# EAGLE board PCB-SSB-1x2b (EAGLE 7.7.0)
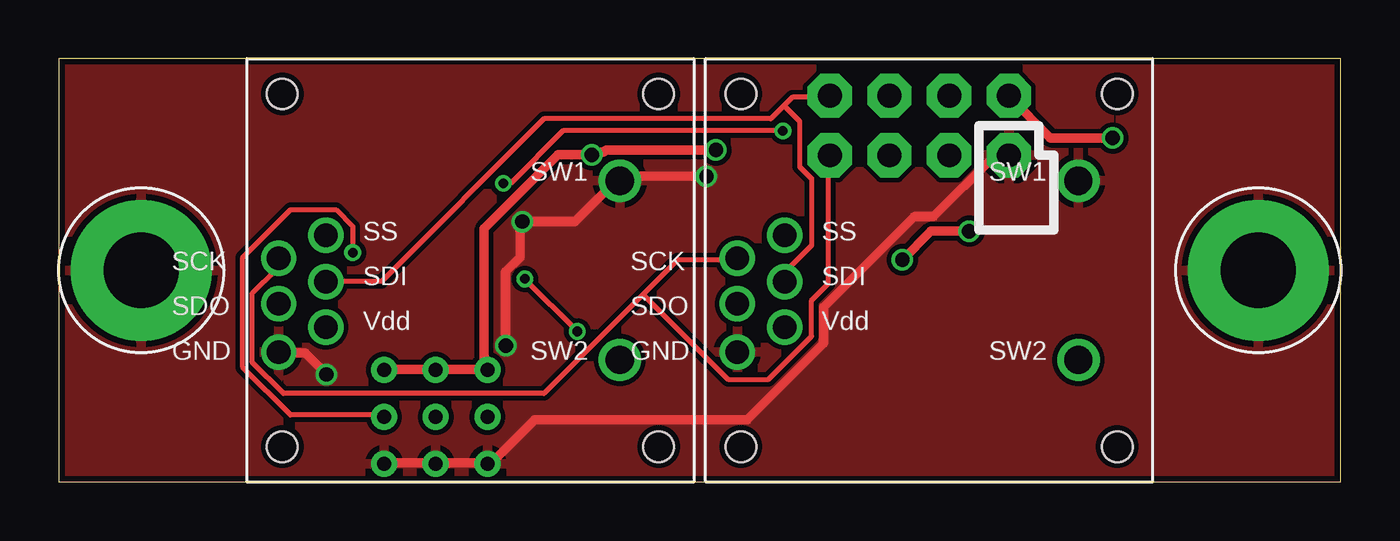
[diagram p0: board, top side]
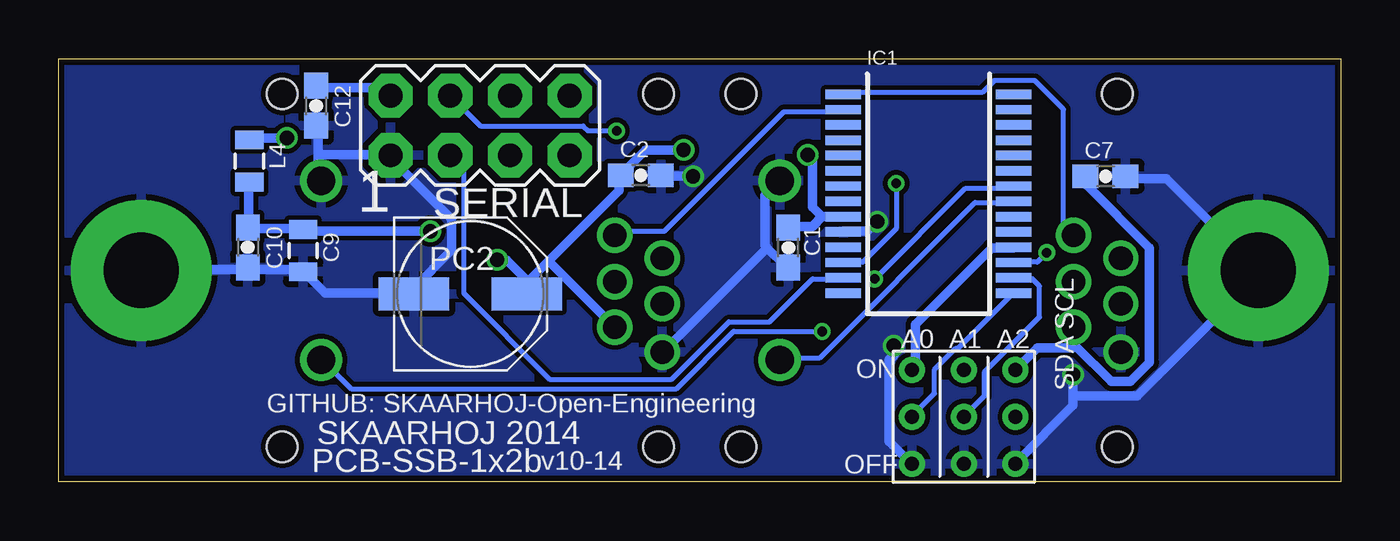
[diagram p1: board, bottom side, seen from below]

Size 54.5 x 18 mm. Coordinates in mm from the lower left corner, seen from the top.
Outline: 0,0 54.5,0 54.5,18 0,18 0,0
Copper layers (1*16): Top 0.035mm / dielectric 1.5mm / Bottom 0.035mm
Design rules "Fusion_eagle_rule_v1.1": minimum track width 6mil, minimum drill 12mil, track to track 6mil, track to pad 6mil, pad to pad 6mil, via to via 6mil, smd to smd 0mil, copper to edge 10mil, drill to drill 10mil, minimum pad ring 10mil, minimum via ring 6mil, stop-mask expansion 2mil, vias tented up to drill 100mil, thermal gap 10mil
Net classes: 0 default: width 0.203 mm, drill 0.406 mm, clearance 0.203 mm; 1 Power: width 0.406 mm, drill 0.61 mm, clearance 0.203 mm

## Footprints (pad centres in the part's own frame; a part is rotated, then mirrored left to right if it is on the bottom)
0603-CAP = smd 1.1 x 1: 1 -0.85,0; 2 0.85,0
0805 = smd 0.8 x 1.2: 1 -0.9,0; 2 0.9,0
SSOP28 = smd 0.4 x 1.5: 1 -4.225,-3.625; 2 -3.575,-3.625; 3 -2.925,-3.625; 4 -2.275,-3.625; 5 -1.625,-3.625; 6 -0.975,-3.625; 7 -0.325,-3.625; 8 0.325,-3.625; 9 0.975,-3.625; 10 1.625,-3.625; 11 2.275,-3.625; 12 2.925,-3.625; 13 3.575,-3.625; 14 4.225,-3.625; 15 4.225,3.625; 16 3.575,3.625; 17 2.925,3.625; 18 2.275,3.625; 19 1.625,3.625; 20 0.975,3.625; 21 0.325,3.625; 22 -0.325,3.625; 23 -0.975,3.625; 24 -1.625,3.625; 25 -2.275,3.625; 26 -2.925,3.625; 27 -3.575,3.625; 28 -4.225,3.625
PANASONIC_D = smd 3 x 1.4: + 2.4,0; - -2.4,0
2X4 = drill 1.016 pad 1.88 octagon: 1 -3.81,-1.27; 2 -3.81,1.27; 3 -1.27,-1.27; 4 -1.27,1.27; 5 1.27,-1.27; 6 1.27,1.27; 7 3.81,-1.27; 8 3.81,1.27
SMART_SWITCH = drill 1.2: 1 6.35,3.81; 2 6.35,-3.81 | drill 1: 3 -8.153,-3.48; 4 -6.147,-2.413; 5 -8.153,-1.422; 6 -6.147,-0.483; 7 -8.153,0.508; 8 -6.147,1.499 | hole 1.3: -8.001,7.506; 8.001,7.506; 8.001,-7.506; -8.001,-7.506
3.2MMPAD6MM = drill 3.2 pad 6: P$1 0,0
3BITADDR = drill 0.6: A0 -2.2,0; A1 0,0; A2 2.2,0; H1 -2.2,2; H2 0,2; H3 2.2,2; L1 -2.2,-2; L2 0,-2; L3 2.2,-2

## Placement (x,y rotation side)
C1  100nF  [0603-CAP]  23.48,9.97 90 bottom
C2  100nF  [0603-CAP]  29.76,13.04 0 bottom
C7  100nF  [0603-CAP]  10,13 0 bottom
C9  22uF  [0805]  44.11,9.84 270 bottom
C10  100nF  [0603-CAP]  46.46,9.98 270 bottom
C12  100nF  [0603-CAP]  43.56,16 270 bottom
IC1  MCP23017SS  [SSOP28]  17.52,12.26 270 bottom
L4  ILHB0805ER121V  [0805]  46.4,13.65 270 bottom
PC2  47u  [PANASONIC_D]  37,8 0 bottom
SERIAL  M04X2  [2X4]  36.59,15.16 0 bottom
SSW1  SMART_SWITCHSMART_SWITCH_8PIN  [SMART_SWITCH]  17.5,9 0 top
SSW2  SMART_SWITCHSMART_SWITCH_8PIN  [SMART_SWITCH]  37,9 0 top
U$15  GNDPAD6MM  [3.2MMPAD6MM]  3.5,9 0 top
U$18  GNDPAD6MM  [3.2MMPAD6MM]  51,9 0 top
U$19  3BITADDR  [3BITADDR]  16.03,2.77 0 bottom

## Library data of the parts
C1 C2 C7 C10 C12 = SparkFun; SKAARHOJ_ID: SK_10uF
C9 = SparkFun; SKAARHOJ_ID: SK_22uF
IC1 = microchip; MF: MICROCHIP; MPN: MCP23017-E/SS; OC_FARNELL: 1467674; OC_NEWARK: 31K2960; SKAARHOJ_ID: SK_MCP23017
L4 = SparkFun; SKAARHOJ_ID: SK_10uHBEAD
PC2 = rcl; SKAARHOJ_ID: SK_47uF
SERIAL = SparkFun; SKAARHOJ_ID: SK_2x4header
SSW1 SSW2 U$15 U$18 U$19 = SKAARHOJ

## Nets
5V [Power]: C1.2 C2.1 C7.1 C9.1 C10.1 IC1.9 IC1.18 L4.2 PC2.+ SSW1.4 SSW2.4 U$19.H1 U$19.H2 U$19.H3
A0: IC1.15 U$19.A0
A1: IC1.16 U$19.A1
A2: IC1.17 U$19.A2
ARD_5V [Power]: C12.1 L4.1 SERIAL.2
DISP_DATA_OUT: SERIAL.6
GND [Power]: C1.1 C2.2 C7.2 C9.2 C10.2 C12.2 IC1.10 PC2.- SERIAL.1 SSW1.1 SSW1.3 SSW2.1 SSW2.3 U$15.P$1 U$18.P$1 U$19.L1 U$19.L2 U$19.L3
GPA0: IC1.21 SSW1.2
GPA1: IC1.22 SSW2.2
GPA2: IC1.23
GPA3: IC1.24
GPB0: IC1.1 SSW1.8
GPB1: IC1.2 SSW2.8
GPB2: IC1.3
GPB3: IC1.4
I2C_SCL: IC1.12 SERIAL.4
I2C_SDA: IC1.13 SERIAL.3
SDI_MOSI: SERIAL.8 SSW1.6 SSW2.6
SDI_SCLK: SERIAL.7 SSW1.7 SSW2.7
SLIDER_IN: SERIAL.5

## Tracks (layer width: path | path; a pad name or v marks a point on that pad's centre or on a via)
5V  (via drill 0.61)
  Top 0.406: U$19.H3 13.92,4.78 15.95,4.78 U$19.H2 16.15,4.78 17.98,4.78 U$19.H1 18.19,4.78 18.09,4.88 18.09,10.77 21.23,13.92 v22.66,13.92 22.76,14.02 23.16,14.02 23.27,14.12 v27.94,14.12 | v38.71,10.67 37.08,10.67 v35.87,9.45
  Bottom 0.406: 11.28,5.79 9.75,4.27 8.94,4.27 8.13,5.08 8.13,9.96 10.77,12.6 10.77,12.9 C7.1 | 11.28,5.79 11.28,6.5 SSW1.4 | 22.05,11.28 22.45,10.87 23.47,10.87 C1.2 | 22.05,11.28 21.23,11.28 IC1.9 | IC1.18 13.92,9.96 14.83,9.96 18.09,6.71 18.09,4.88 18.19,4.78 U$19.H1 | 22.05,11.28 22.45,11.68 22.45,13.72 v22.66,13.92 | 11.28,5.79 11.38,5.69 12.9,5.69 13.82,4.78 U$19.H3 | L4.2 46.43,12.7 46.43,10.87 C10.1 46.33,10.77 44.2,10.77 C9.1 43.99,10.67 v38.71,10.67 | 33.68,9.4 34.54,8.53 34.54,8.03 PC2.+ 34.65,8.64 35.46,9.45 v35.87,9.45 | 33.68,9.4 30.68,12.39 30.68,13.01 C2.1 30.48,13.21 29.57,14.12 v27.94,14.12 | 33.68,9.4 30.89,6.6 SSW2.4
A0
  Bottom 0.203: IC1.15 13.92,8.03 16.26,5.69 16.36,5.69 17.27,4.78 17.27,3.76 18.19,2.85 U$19.A0
A1
  Bottom 0.203: IC1.16 13.82,8.64 13.11,8.64 12.8,8.33 12.8,7.01 15.14,4.67 15.14,3.66 15.95,2.85 U$19.A1
A2  (via drill 0.41)
  Top 0.203: v12.5,9.75 12.5,10.87 11.79,11.58 9.86,11.58 7.82,9.55 7.82,4.88 9.86,2.85 13.82,2.85 U$19.A2
  Bottom 0.203: v12.5,9.75 12.9,9.35 13.82,9.35 IC1.17
ARD_5V  (via drill 0.61)
  Top 0.406: v44.81,14.63 42.16,14.63 40.44,16.36 SERIAL.2
  Bottom 0.406: C12.1 43.48,16.76 40.74,16.76 40.44,16.46 SERIAL.2 | v44.81,14.63 46.33,14.63 L4.1
GND  (via drill 0.61)
  Top 0.406: v27.53,13.01 23.98,13.01 23.88,12.9 SSW1.1 23.67,12.8 21.95,11.07 v19.71,11.07 19.61,10.97 19.61,9.55 19,8.94 v19,5.79 | U$19.L3 13.92,0.81 15.95,0.81 U$19.L2 16.15,0.81 18.19,0.81 U$19.L1 18.39,0.81 20.22,2.64 29.26,2.64 32.51,5.89 32.51,7.42 36.37,11.28 37.19,11.28 39.73,13.82 40.34,13.82 SERIAL.1 | v11.38,4.57 10.46,5.49 9.35,5.49 SSW1.3
  Bottom 0.406: 43.48,13.92 43.48,13.01 43.38,12.9 SSW2.1 | 43.48,13.92 43.48,15.14 C12.2 | 43.48,13.92 40.44,13.92 SERIAL.1 40.34,13.72 37.8,11.18 37.8,9.86 39.42,8.23 PC2.- 39.42,8.03 43.18,8.03 43.99,8.84 C9.2 44.2,9.04 46.43,9.04 C10.2 46.63,9.04 50.9,9.04 U$18.P$1 | 24.38,9.96 24.49,10.06 24.49,12.19 23.88,12.8 SSW1.1 | 24.38,9.96 23.57,9.14 C1.1 | v27.53,13.01 28.85,13.01 C2.2 | v19.71,11.07 20.12,10.67 21.13,10.67 IC1.10 | 24.38,9.96 28.75,5.59 SSW2.3 | 11.38,3.66 11.38,3.25 13.82,0.81 U$19.L3 | 11.38,3.66 v11.38,4.57 | C7.2 9.14,12.9 7.42,12.9 3.56,9.04 U$15.P$1 3.45,8.84 8.64,3.66 11.38,3.66 | v19,5.79 19,5.38 19.2,5.18 19.2,1.73 18.29,0.81 U$19.L1
  pour Top: 0,0 55,0 55,18 0,18
  pour Bottom: 0,0 55,0 55,18 0,18
GPA0
  Bottom 0.203: IC1.21 13.92,11.89 15.54,11.89 22.15,5.28 23.77,5.28 SSW1.2
GPA1  (via drill 0.41)
  Top 0.203: v22.05,6.4 v19.81,8.64
  Bottom 0.203: v19.81,8.64 15.95,12.5 13.92,12.5 IC1.22 | v22.05,6.4 25.81,6.4 28.25,3.96 42.06,3.96 43.28,5.18 SSW2.2
GPB0
  Bottom 0.203: IC1.1 21.13,16.56 15.24,16.56 14.73,17.07 13.01,17.07 11.79,15.85 11.79,10.97 11.38,10.57 SSW1.8
GPB1
  Bottom 0.203: IC1.2 21.23,15.75 23.67,15.75 28.75,10.67 30.68,10.67 30.79,10.57 SSW2.8
I2C_SCL  (via drill 0.41)
  Top 0.203: v18.9,12.7 19.2,12.7 21.44,14.94 v30.79,14.94
  Bottom 0.203: v18.9,12.7 18.9,10.77 20.32,9.35 21.13,9.35 IC1.12 | v30.79,14.94 32,14.94 32.21,15.14 36.58,15.14 37.8,16.36 SERIAL.4
I2C_SDA
  Bottom 0.203: IC1.13 21.23,8.64 22.45,8.64 24.28,6.81 26.01,6.81 28.45,4.37 33.63,4.37 37.29,8.03 37.29,13.31 37.8,13.82 SERIAL.3
SDI_MOSI
  Top 0.203: 30.84,16 31.19,16.36 32.72,16.36 SERIAL.8 | 30.84,16 30.28,15.44 20.62,15.44 13.72,8.53 11.38,8.53 SSW1.6 | 30.84,16 31.5,15.34 31.5,13.41 32,12.9 32,10.06 30.89,8.94 30.89,8.53 SSW2.6
SDI_SCLK
  Top 0.203: 24.84,7.98 26.31,9.45 28.75,9.45 SSW2.7 | 24.84,7.98 20.62,3.76 9.55,3.76 8.23,5.08 8.23,8.03 9.25,9.04 9.25,9.45 SSW1.7 | 24.84,7.98 28.45,4.37 30.18,4.37 32,6.2 32,7.72 32.72,8.43 32.72,13.82 SERIAL.7

## Text on the board
_bsilk: 1 | SCL | SDA | GITHUB: SKAARHOJ-Open-Engineering | SKAARHOJ 2014 | v10-14 | PCB-SSB-1x2b